# EAGLE board prop-driver (EAGLE 6.4)
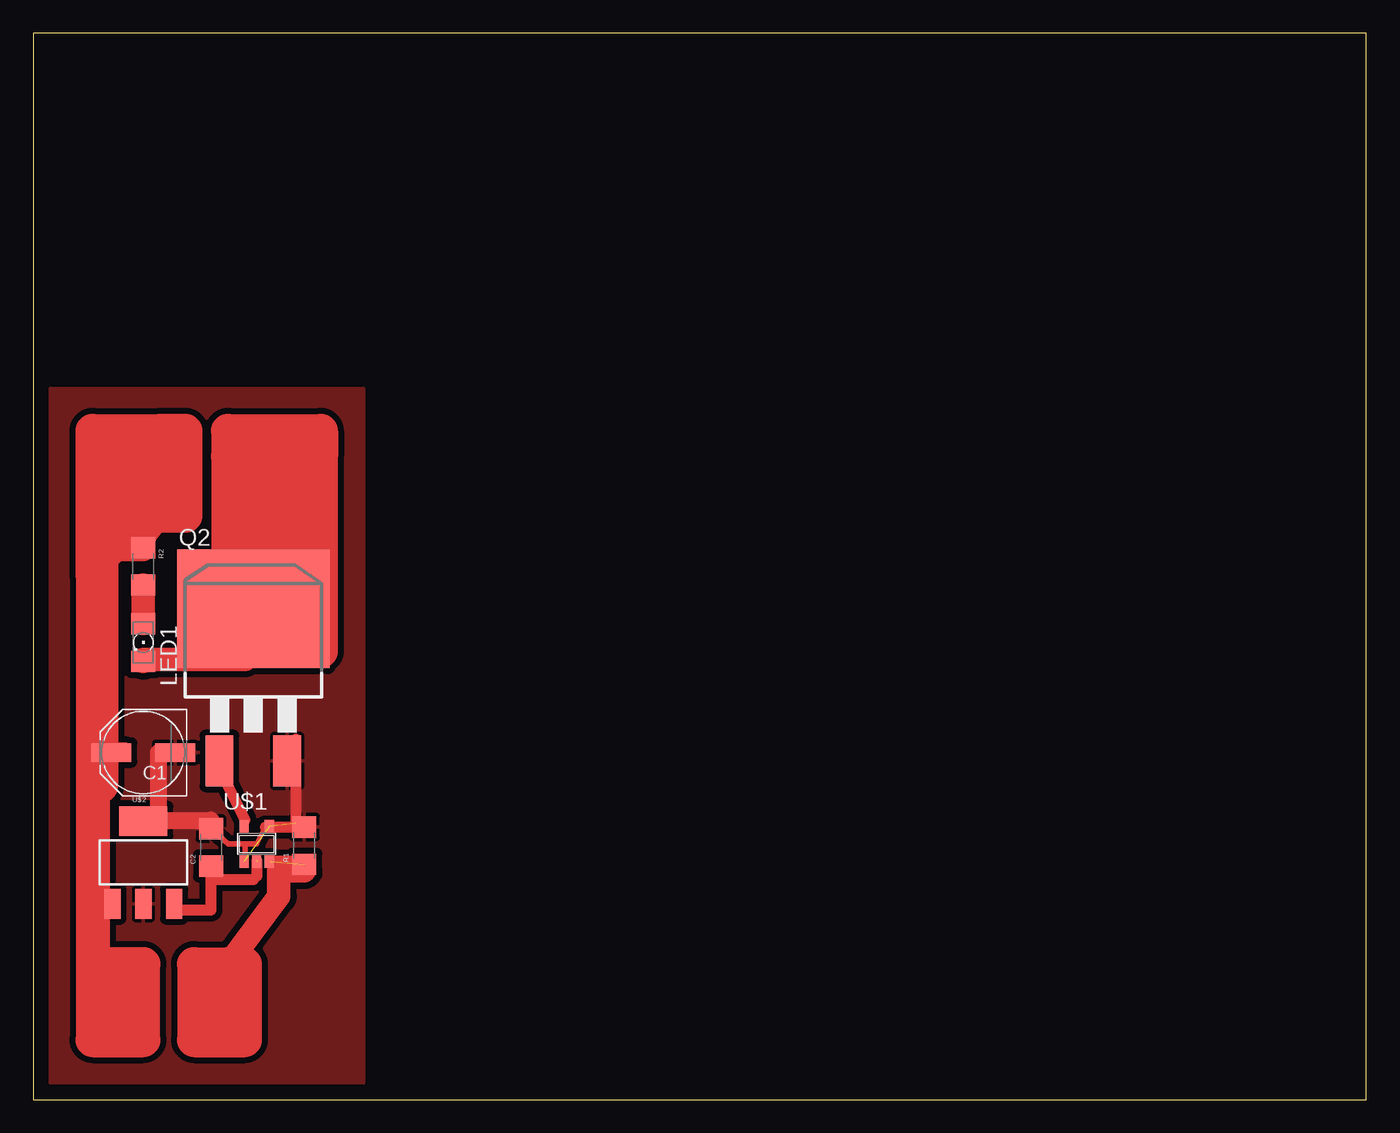
[diagram p0: board, top side]

Size 100 x 80 mm. Coordinates in mm from the lower left corner, seen from the top.
Outline: 0,0 100,0 100,80 0,80 0,0
Copper layers (1*16): Top 0.035mm / dielectric 1.5mm / Bottom 0.035mm
Design rules "default *": minimum track width 10mil, minimum drill 24mil, track to track 18mil, track to pad 18mil, pad to pad 8mil, via to via 8mil, smd to smd 8mil, copper to edge 40mil, drill to drill 8mil, minimum pad ring 10mil, minimum via ring 8mil, stop-mask expansion 4mil, vias tented up to drill 0mil, thermal gap 10mil

## Footprints (pad centres in the part's own frame; a part is rotated, then mirrored left to right if it is on the bottom)
PANASONIC_D = smd 3 x 1.4: + 2.4,0; - -2.4,0
1206 = smd 1.6 x 1.8: 1 -1.4,0; 2 1.4,0
FKIT-LED-1206 = smd 1.6 x 1.803: A -1.422,0; C 1.422,0
D2PACK = smd 2.083 x 3.81: 1 -2.54,-8.89; 3 2.54,-8.89 | smd 11.43 x 8.89: 2 0,2.54
SOT23-5 = smd 0.69 x 0.99: 1 -0.95,-1.29; 2 0,-1.29; 3 0.95,-1.29; 4 0.95,1.3; 5 -0.95,1.3
SOT223 = smd 1.219 x 2.235: 1 -2.311,-3.099; 2 0,-3.099; 3 2.311,-3.099 | smd 3.6 x 2.2: 4 0,3.099

## Placement (x,y rotation side)
C1  [PANASONIC_D]  8.26,26.04 180 top
C2  [1206]  13.34,18.92 90 top
LED1  [FKIT-LED-1206]  8.26,34.29 270 top
Q2  IRF3704S  [D2PACK]  16.51,34.29 0 top
R1  [1206]  20.32,19.05 90 top
R2  [1206]  8.26,40.01 270 top
U$1  MCP1402  [SOT23-5]  16.76,19.18 0 top
U$2  V_REG_MIC2920  [SOT223]  8.26,17.78 0 top

## Library data of the parts
C1 C2 LED1 R1 R2 U$2 = SparkFun
Q2 = transistor-power
U$1 = johndavid400

## Nets
+5V: C2.1 U$1.2 U$2.3
GND: C1.- C2.2 Q2.3 R1.2 U$1.1 U$1.4 U$2.2
N$1: Q2.1 U$1.5
N$2: R1.1 U$1.3
N$5: LED1.C Q2.2
N$14: LED1.A R2.2
VDD: C1.+ R2.1 U$2.1

## Tracks (layer width: path | path; a pad name or v marks a point on that pad's centre or on a via)
+5V  (1 unrouted)
  Top 0.254: 10.67,14.73 U$2.3 | 13.34,16.51 C2.1 13.34,17.78
  Top 0.406: 13.34,14.22 13.08,14.22
  Top 0.813: 10.67,14.73 10.67,14.22 13.34,14.22 13.34,14.61 13.34,16.51 | 16.76,17.91 16.76,16.76 16.51,16.51 13.34,16.51 | 13.34,16.51 13.34,17.14
GND  (2 unrouted)
  Top 0.254: 19.68,20.7 R1.2 | 19.68,27.05 Q2.3 | 8.26,20.95 9.4,20.95 | 9.4,26.04 C1.- | 13.34,20.95 C2.2 | 8.26,14.61 U$2.2
  Top 0.813: 19.68,27.05 19.68,20.7
  Top 1.27: 13.34,20.95 9.4,20.95 9.4,26.04
  pour Top: 1.27,53.34 1.27,1.27 24.77,1.27 24.77,53.34
N$1
  Top 0.254: 15.88,20.95 U$1.5 | 13.97,24.77 Q2.1
  Top 0.813: 13.97,24.77 15.88,20.95
N$2  (1 unrouted)
N$3
  Top 0.406: 15.88,17.91 15.88,19.18 14.61,19.18 13.34,20.32
N$5
  Top 0.254: 15.88,34.29 16.51,33.02 Q2.2
  Top 1.778: 15.88,34.29 15.88,33.02 8.26,33.02 LED1.C
N$6
  Top 2.54: 7.62,48.26 7.62,46.35
N$9
  Top 0.406: 15.88,17.91 15.88,19.18 16.76,19.18 17.4,20.45
  Top 0.813: 17.4,20.45 19.94,20.45
N$10
  Top 0.813: 17.78,17.91 20.19,17.91
N$11
  Top 1.778: 18.41,17.14 20.32,17.14
N$12
  Top 1.778: 14.61,10.16 18.41,15.24 18.41,17.14
  Top 2.54: 12.06,10.16 14.61,10.16 15.88,10.16 15.88,4.45 12.06,4.45 12.06,10.16
N$13
  Top 2.54: 4.45,40.64 4.45,4.45 8.26,4.45 8.26,10.16 5.71,10.16 5.71,6.35 6.99,6.35 6.99,9.53
N$14
  Top 0.254: 8.26,38.1 R2.2
  Top 1.778: R2.2 LED1.A
N$15
  Top 2.54: 13.97,40.01 16.51,40.01 16.51,46.35 19.68,46.35 19.68,40.64
N$16
  Top 2.54: 18.41,41.91 15.24,41.91 15.24,44.45 18.41,44.45 18.41,43.18 15.88,43.18
N$17
  Top 2.54: 16.51,45.09 14.61,40.01 14.61,48.26 | 21.59,33.66 21.59,48.26 | 21.59,48.26 14.61,48.26 | 14.61,48.26 14.61,50.16 21.59,50.16 21.59,48.26
N$18
  Top 2.54: 5.08,26.04 5.08,23.5
N$19
  Top 2.54: 13.97,9.53 13.97,6.35
VDD
  Top 0.254: 4.06,28.32 C1.+ 6.99,26.67 5.08,26.67 4.45,26.67 4.45,39.37 | 4.06,16.89 U$2.1 3.81,14.61 4.06,16.89
  Top 0.813: 4.06,16.89 4.06,28.32
  Top 1.778: 4.45,41.27 5.71,41.27 8.26,41.27 R2.1
  Top 2.54: 4.45,39.37 4.45,41.27 4.45,41.91 | 4.45,41.91 4.45,45.09 | 4.45,45.09 4.45,50.16 9.53,50.16 | 9.53,50.16 9.53,48.9 | 9.53,48.9 9.53,45.72 | 9.53,45.72 4.45,45.09 | 4.45,41.91 5.08,41.91 | 5.08,41.91 5.71,41.91 | 9.53,44.45 7.62,41.91 5.71,41.91 | 9.53,44.45 6.35,44.45 | 6.35,44.45 6.35,42.55 | 6.35,44.45 6.35,48.26 | 8.26,48.26 9.53,48.9 | 9.53,45.72 9.53,44.45 | 5.08,41.91 5.08,26.67 | 5.71,41.91 5.71,41.27 | 8.89,43.81 11.43,43.81 11.43,50.16 9.53,50.16